# Altium PCB LitosConnector.PcbDoc
Units mm, origin at the board's own origin, x right, y up, seen from the top; angles counter-clockwise.
Board outline 53 x 160.5 mm, 2 copper layers (Top Layer, Bottom Layer); 7 components, 120 nets, 244 pads, 54 vias.
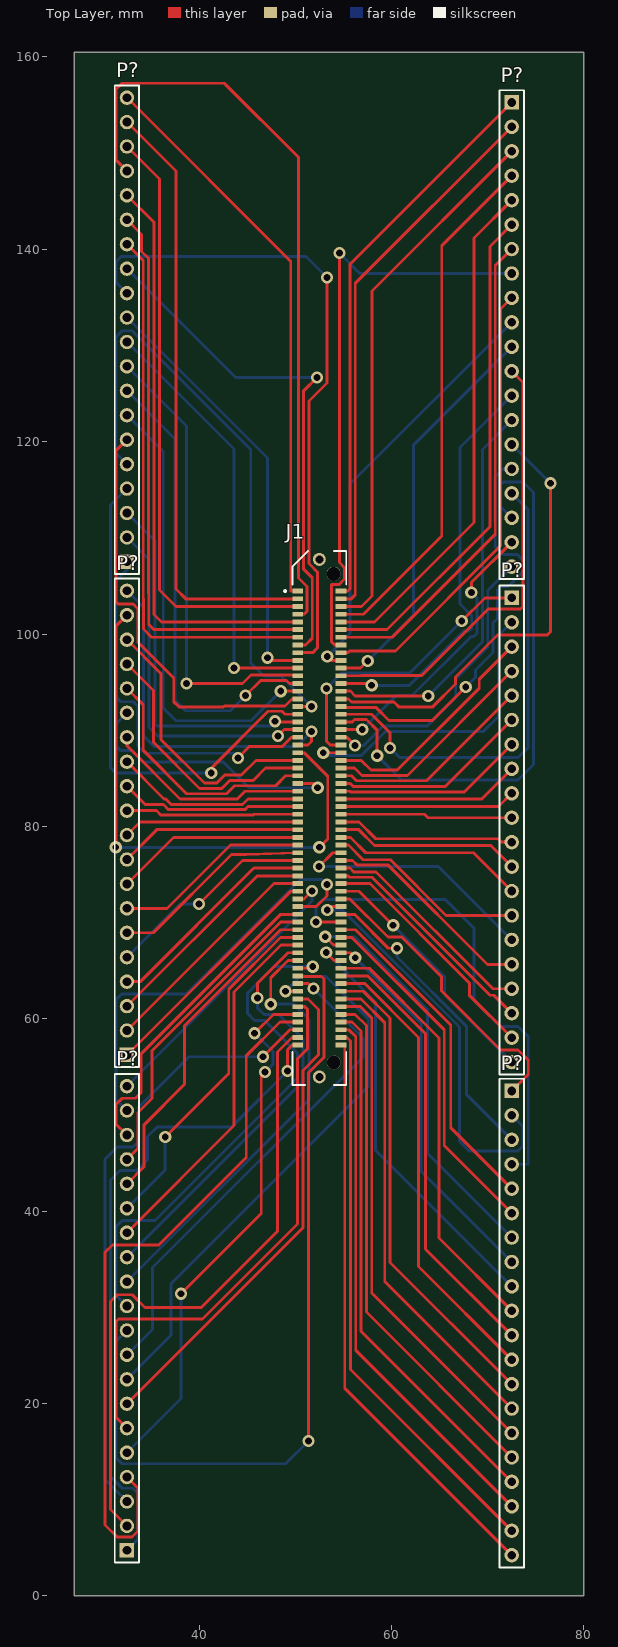
[diagram p0: Top Layer view]
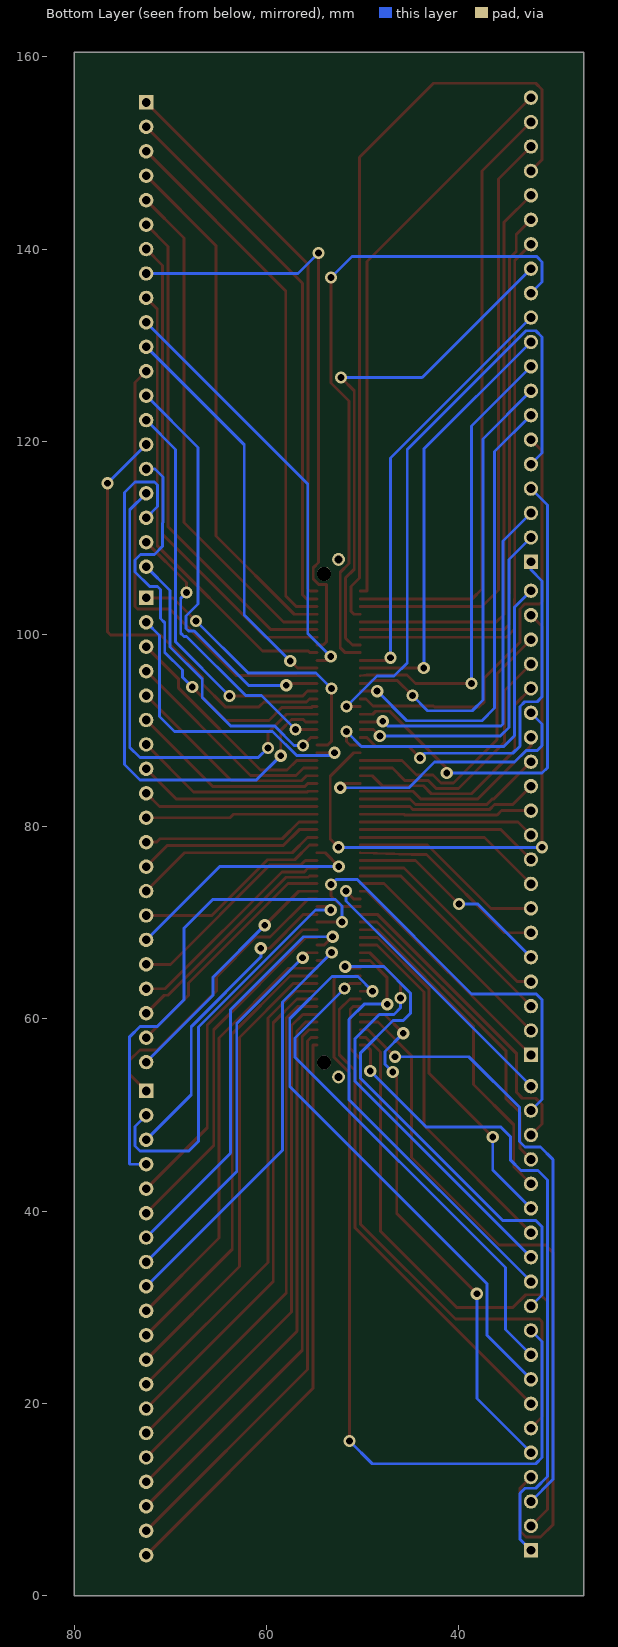
[diagram p1: Bottom Layer view, seen from below]

## Layer stack, top to bottom
Top Solder: solder mask 0.0102, Solder Resist, Dk 3.5
Top Layer: signal copper 0.0356
Dielectric 1: dielectric 0.32, FR-4, Dk 4.8
Bottom Layer: signal copper 0.0356
Bottom Solder: solder mask 0.0102, Solder Resist, Dk 3.5

## Board outline
27,0 80,0 80,160.5 27,160.5

## Design rules (kind name [scope] priority, off if disabled: settings)
Clearance [All] p1: gap=0.254 ignorepadtopadclearanceinfootprint=FALSE except(0: Arc-Hole Track-Hole SMDPad-Hole THPad-Hole Via-Hole Fill-Hole Poly-Hole Region-Hole Text-Hole)
PolygonConnect [All] p1: connectstyle=Relief reliefconductorwidth=0.254 reliefentries=4 polygonreliefangle="90 Angle" airgapwidth=0.254
RoutingVias [All] p1: holewidth=0.711 width=1.27 viastyle="Through Hole" minholewidth=0.711 minwidth=1.27 maxholewidth=0.711 maxwidth=1.27
SolderMaskExpansion [All] p1: expansion=0.102 istentingtop=FALSE
Width [All] p1: maxlimit=0.3 minlimit=0.254 preferedwidth=0.3 minimp=50.000000 maximp=50.000000 favimp=50.000000
30 further rules are at their usual default settings.

## Components (designator, comment, footprint, x,y, rotation, side; value= is the part's Value field where it differs from the comment)
J1 "ERF8-060-05.0-L-DV-L-TR" SAMTEC_ERF8-060-05.0-L-DV-L-TR 52.5,80.86 r90 top
P? "Header 20" HDR1X20 72.5,155.26 r270 top
P? "Header 20" HDR1X20 32.5,56.24 r90 top
P? "Header 20" HDR1X20 32.5,4.74 r90 top
P? "Header 20" HDR1X20 32.5,107.5 r90 top
P? "Header 20" HDR1X20 72.5,103.76 r270 top
P? "Header 20" HDR1X20 72.5,52.5 r270 top

## Footprints (in the part's own frame and the unit in brackets; to place one, negate y for a bottom-side part, rotate by r counter-clockwise, add the part's x,y. Pads: shape width x height; smd on the part's side, far side on the other; paste and mask are expansions set on the pad)
HDR1X20 [mm] "Connector; Header; 20 Position"
  rect 1.5x1.5 hole 0.9: 1(0,0)
  round 1.5 hole 0.9: 2(2.54,0) 3(5.08,0) 4(7.62,0) 5(10.16,0) 6(12.7,0) 7(15.24,0) 8(17.78,0) 9(20.32,0) 10(22.86,0) 11(25.4,0) 12(27.94,0) 13(30.48,0) 14(33.02,0) 15(35.56,0) 16(38.1,0) 17(40.64,0) 18(43.18,0) 19(45.72,0) 20(48.26,0)
  silkscreen extent -1.27,-1.27 49.53,1.27
SAMTEC_ERF8-060-05.0-L-DV-L-TR [mm]
  rect 0.5x1.1 smd: 01(23.6,2.25) 02(23.6,-2.25) 03(22.8,2.25) 04(22.8,-2.25) 05(22,2.25) 06(22,-2.25) 07(21.2,2.25) 08(21.2,-2.25) 09(20.4,2.25) 10(20.4,-2.25) 11(19.6,2.25) 12(19.6,-2.25) 13(18.8,2.25) 14(18.8,-2.25) 15(18,2.25) 16(18,-2.25) 17(17.2,2.25) 18(17.2,-2.25) 19(16.4,2.25) 20(16.4,-2.25) 21(15.6,2.25) 22(15.6,-2.25) 23(14.8,2.25) 24(14.8,-2.25) 25(14,2.25) 26(14,-2.25) 27(13.2,2.25) 28(13.2,-2.25) 29(12.4,2.25) 30(12.4,-2.25) 31(11.6,2.25) 32(11.6,-2.25) 33(10.8,2.25) 34(10.8,-2.25) 35(10,2.25) 36(10,-2.25) 37(9.2,2.25) 38(9.2,-2.25) 39(8.4,2.25) 40(8.4,-2.25) 41(7.6,2.25) 42(7.6,-2.25) 43(6.8,2.25) 44(6.8,-2.25) 45(6,2.25) 46(6,-2.25) 47(5.2,2.25) 48(5.2,-2.25) 49(4.4,2.25) 50(4.4,-2.25) 51(3.6,2.25) 52(3.6,-2.25) 53(2.8,2.25) 54(2.8,-2.25) 55(2,2.25) 56(2,-2.25) 57(1.2,2.25) 58(1.2,-2.25) 59(0.4,2.25) 60(0.4,-2.25) 61(-0.4,2.25) 62(-0.4,-2.25) 63(-1.2,2.25) 64(-1.2,-2.25) 65(-2,2.25) 66(-2,-2.25) 67(-2.8,2.25) 68(-2.8,-2.25) 69(-3.6,2.25) 70(-3.6,-2.25) 71(-4.4,2.25) 72(-4.4,-2.25) 73(-5.2,2.25) 74(-5.2,-2.25) 75(-6,2.25) 76(-6,-2.25) 77(-6.8,2.25) 78(-6.8,-2.25) 79(-7.6,2.25) 80(-7.6,-2.25) 81(-8.4,2.25) 82(-8.4,-2.25) 83(-9.2,2.25) 84(-9.2,-2.25) 85(-10,2.25) 86(-10,-2.25) 87(-10.8,2.25) 88(-10.8,-2.25) 89(-11.6,2.25) 90(-11.6,-2.25) 91(-12.4,2.25) 92(-12.4,-2.25) 93(-13.2,2.25) 94(-13.2,-2.25) 95(-14,2.25) 96(-14,-2.25) 97(-14.8,2.25) 98(-14.8,-2.25) 99(-15.6,2.25) 100(-15.6,-2.25) 101(-16.4,2.25) 102(-16.4,-2.25) 103(-17.2,2.25) 104(-17.2,-2.25) 105(-18,2.25) 106(-18,-2.25) 107(-18.8,2.25) 108(-18.8,-2.25) 109(-19.6,2.25) 110(-19.6,-2.25) 111(-20.4,2.25) 112(-20.4,-2.25) 113(-21.2,2.25) 114(-21.2,-2.25) 115(-22,2.25) 116(-22,-2.25) 117(-22.8,2.25) 118(-22.8,-2.25) 119(-23.6,2.25) 120(-23.6,-2.25)
  round 1.338 hole 0.83: S1(-26.9,0) S2(26.9,0)
  round 1.45 hole 1.45 unplated: ""(-25.4,-1.5) ""(25.4,-1.5)
  silkscreen extent -27.75,-2.8 27.75,3.66

## Part data
P? P? P? P? P? P?: "Header, 20-Pin", LatestRevisionDate=17-Jul-2002, LatestRevisionNote="Re-released for DXP Platform.", Publisher="Altium Limited"

## Via types
v1: diameter 1.27, hole 0.711, Top Layer to Bottom Layer, 54 vias

## Nets (pads, with @x,y where several pads share a name; then routed paths per layer and width w, separated by ;. In a path a pad name is that pad's centre, name@x,y a point inside that pad or via, vN(x,y) a via of type N, cw(c..) or ccw(c..) an arc to the next point about the centre after c; other vN are vias at no path point)
NetJ1_01: J1.01 P?.20@32.5,155.76 | length 59.1
  Top Layer w0.3: P?.20@32.5,155.76 49.53,138.73 49.53,104.46 J1.01
NetJ1_02: J1.02 P?.1@72.5,155.26 | length 58.6
  Top Layer w0.3: J1.02 55.47,104.46 55.683,104.673 55.683,138.443 P?.1@72.5,155.26
NetJ1_03: J1.03 P?.19@32.5,153.22 | length 63.7
  Top Layer w0.3: P?.19@32.5,153.22 37.592,148.128 37.592,104.676 38.608,103.66 J1.03
NetJ1_04: J1.04 P?.2@72.5,152.72 | length 57
  Top Layer w0.3: J1.04 55.821,103.66 56.237,104.076 56.237,136.457 P?.2@72.5,152.72
NetJ1_05: J1.05 P?.18@32.5,150.68 | length 62.6
  Top Layer w0.3: P?.18@32.5,150.68 35.87,147.31 35.87,104.582 37.592,102.86 J1.05
NetJ1_06: J1.06 P?.3@72.5,150.18 | length 55.9
  Top Layer w0.3: J1.06 56.896,102.86 57.988,103.952 57.988,135.668 P?.3@72.5,150.18
NetJ1_07: J1.07 P?.17@32.5,148.14 | length 80
  Top Layer w0.3: P?.17@32.5,148.14 31.344,149.296 31.344,156.591 32.004,157.251 42.621,157.251 50.319,149.554 50.319,105.83 51.206,104.943 51.206,102.362 50.904,102.06 J1.07
NetJ1_08: J1.08 P?.4@72.5,147.64 | length 54.3
  Top Layer w0.3: J1.08 57.102,102.06 65.227,110.185 65.227,140.367 P?.4@72.5,147.64
NetJ1_09: J1.09 P?.16@32.5,145.6 | length 60
  Top Layer w0.3: P?.16@32.5,145.6 35.296,142.804 35.296,120.138 35.316,120.119 35.316,102.044 36.1,101.26 J1.09
NetJ1_10: J1.10 P?.5@72.5,145.1 | length 53.2
  Top Layer w0.3: J1.10 58.233,101.26 68.58,111.607 68.58,141.18 P?.5@72.5,145.1
NetJ1_11: J1.11 P?.15@32.5,143.06 | length 58.7
  Top Layer w0.3: P?.15@32.5,143.06 34.024,141.536 34.024,139.779 34.742,139.061 34.742,104.242 34.762,104.222 34.762,100.977 35.279,100.46 J1.11
NetJ1_12: J1.12 P?.6@72.5,142.56 | length 52.3
  Top Layer w0.3: J1.12 59.546,100.46 70.238,111.152 70.238,140.298 P?.6@72.5,142.56
NetJ1_13: J1.13 P?.14@32.5,140.52 | length 57.1
  Top Layer w0.3: P?.14@32.5,140.52 34.188,138.832 34.188,103.668 34.208,103.648 34.208,100.506 35.054,99.66 J1.13
NetJ1_14: J1.14 P?.7@72.5,140.02 | length 50.8
  Top Layer w0.3: J1.14 60.083,99.66 70.792,110.369 70.792,138.312 P?.7@72.5,140.02
NetJ1_15: J1.15 P?.13@32.5,137.98 | length 54.3
  Top Layer w0.3: J1.15 51.057,98.86 51.765,99.568 51.765,105.842 50.873,106.734 50.873,125.295 v1(52.248,126.67)
  Bottom Layer w0.3: P?.13@32.5,137.98 43.81,126.67 v1(52.248,126.67)
NetJ1_16: J1.16 P?.8@72.5,137.48 | length 61.5
  Top Layer w0.3: v1(54.585,139.598) 54.585,107.442 55.129,106.898 55.129,105.726 54.534,105.131 53.772,105.131 53.772,99.19 54.102,98.86 J1.16
  Bottom Layer w0.3: v1(54.585,139.598) 56.703,137.48 P?.8@72.5,137.48
NetJ1_17: J1.17 P?.12@32.5,135.44 | length 68.7
  Top Layer w0.3: J1.17 51.816,98.06 52.324,98.568 52.324,106.418 51.427,107.316 51.427,124.223 53.289,126.086 v1(53.289,137.058)
  Bottom Layer w0.3: P?.12@32.5,135.44 31.344,136.596 31.344,138.684 31.902,139.243 51.105,139.243 v1(53.289,137.058)
NetJ1_18: J1.18 P?.9@72.5,134.94 | length 47.4
  Top Layer w0.3: J1.18 55.464,98.06 55.651,98.247 60.424,98.247 71.346,109.169 71.346,133.786 P?.9@72.5,134.94
NetJ1_19: J1.19 P?.11@32.5,132.9 | length 44.7
  Top Layer w0.3: v1(47.114,97.536) 47.39,97.26 J1.19
  Bottom Layer w0.3: P?.11@32.5,132.9 47.114,118.286 v1(47.114,97.536)
NetJ1_20: J1.20 P?.10@72.5,132.4 | length 44.3
  Top Layer w0.3: v1(53.315,97.663) 53.718,97.26 J1.20
  Bottom Layer w0.3: v1(53.315,97.663) 55.702,100.051 55.702,115.602 P?.10@72.5,132.4
NetJ1_21: J1.21 P?.10@32.5,130.36 | length 45.1
  Top Layer w0.3: v1(43.638,96.46) J1.21
  Bottom Layer w0.3: P?.10@32.5,130.36 43.638,119.222 v1(43.638,96.46)
NetJ1_22: J1.22 P?.11@72.5,129.86 | length 41.9
  Top Layer w0.3: J1.22 56.785,96.46 v1(57.531,97.206)
  Bottom Layer w0.3: v1(57.531,97.206) 62.306,101.981 62.306,119.666 P?.11@72.5,129.86
NetJ1_23: J1.23 P?.9@32.5,127.82 | length 47.5
  Top Layer w0.3: v1(38.684,94.843) 44.506,94.843 45.388,95.725 49.581,95.725 J1.23
  Bottom Layer w0.3: P?.9@32.5,127.82 38.684,121.636 v1(38.684,94.843)
NetJ1_24: J1.24 P?.12@72.5,127.32 | length 46.8
  Top Layer w0.3: J1.24 56.871,95.66 56.918,95.707 63.17,95.707 70.053,102.591 73.406,102.591 73.66,102.845 73.66,126.16 P?.12@72.5,127.32
NetJ1_25: J1.25 P?.8@32.5,125.28 | length 48.9
  Top Layer w0.3: v1(44.827,93.594) 46.404,95.171 49.092,95.171 49.403,94.86 J1.25
  Bottom Layer w0.3: P?.8@32.5,125.28 37.49,120.29 37.49,93.141 38.608,92.024 43.256,92.024 v1(44.827,93.594)
NetJ1_26: J1.26 P?.13@72.5,124.78 | length 43.1
  Top Layer w0.3: J1.26 57.743,94.86 v1(57.937,94.666)
  Bottom Layer w0.3: v1(57.937,94.666) 61.869,94.666 67.511,100.307 68.072,100.307 68.349,100.584 68.349,101.882 67.107,103.124 67.107,119.387 P?.13@72.5,124.78
NetJ1_27: J1.27 P?.7@32.5,122.74 | length 47.8
  Top Layer w0.3: v1(48.489,94.06) J1.27
  Bottom Layer w0.3: P?.7@32.5,122.74 36.275,118.965 36.275,92.296 37.592,90.979 45.408,90.979 v1(48.489,94.06)
NetJ1_28: J1.28 P?.14@72.5,122.24 | length 41.5
  Top Layer w0.3: J1.28 55.728,94.06 56.22,93.568 v1(63.826,93.568)
  Bottom Layer w0.3: v1(63.826,93.568) 69.457,99.199 69.457,119.197 P?.14@72.5,122.24
NetJ1_29: J1.29 P?.6@32.5,120.2 | length 44.6
  Top Layer w0.3: P?.6@32.5,120.2 31.344,119.044 31.344,103.378 31.598,103.124 33.146,103.124 33.654,102.616 33.654,99.142 37.363,95.433 37.363,92.964 37.897,92.431 42.52,92.431 42.621,92.532 48.92,92.532 49.648,93.26 J1.29
NetJ1_30: J1.30 P?.15@72.5,119.7 | length 46.9
  Top Layer w0.3: J1.30 55.524,93.26 55.846,92.939 60.249,92.939 60.757,92.431 64.287,92.431 66.658,94.801 66.658,95.546 71.01,99.898 76.2,99.898 76.53,100.228 v1(76.53,115.67)
  Bottom Layer w0.3: P?.15@72.5,119.7 v1(76.53,115.67)
NetJ1_31: J1.31 P?.5@32.5,117.66 | length 64.9
  Top Layer w0.3: J1.31 v1(51.689,92.46)
  Bottom Layer w0.3: P?.5@32.5,117.66 31.344,118.816 31.344,130.861 32.004,131.521 33.02,131.521 45.364,119.177 45.364,97.003 46.736,95.631 48.518,95.631 v1(51.689,92.46)
NetJ1_32: J1.32 P?.16@72.5,117.16 | length 44
  Top Layer w0.3: J1.32 55.245,92.46 55.245,92.38 58.369,92.38 59.741,91.008 64.237,91.008 v1(67.716,94.488)
  Bottom Layer w0.3: v1(67.716,94.488) 68.732,95.504 68.732,96.258 70.565,98.091 70.565,101.172 71.018,101.625 71.018,104.623 71.323,104.927 72.136,104.927 73.654,106.445 73.654,107.702 73.076,108.28 71.628,108.28 70.79,109.118 70.79,111.557 70.764,111.582 70.764,116.332 71.592,117.16 P?.16@72.5,117.16
NetJ1_33: J1.33 P?.4@32.5,115.12 | length 52.5
  Top Layer w0.3: v1(41.261,85.547) 41.261,86.055 47.176,91.971 48.632,91.971 48.943,91.66 J1.33
  Bottom Layer w0.3: P?.4@32.5,115.12 30.792,113.412 30.792,86.099 31.344,85.547 v1(41.261,85.547)
NetJ1_34: J1.34 P?.17@72.5,114.62 | length 49.8
  Top Layer w0.3: J1.34 57.912,91.66 59.835,89.737 v1(59.835,88.163)
  Bottom Layer w0.3: v1(59.835,88.163) 60.851,87.147 73.152,87.147 74.208,88.203 74.208,112.912 P?.17@72.5,114.62
NetJ1_35: J1.35 P?.3@32.5,112.58 | length 38.3
  Top Layer w0.3: v1(47.904,90.932) 47.976,90.86 J1.35
  Bottom Layer w0.3: P?.3@32.5,112.58 35.407,109.673 35.407,90.653 35.636,90.424 47.396,90.424 v1(47.904,90.932)
NetJ1_36: J1.36 P?.18@72.5,112.08 | length 61.1
  Top Layer w0.3: J1.36 55.925,90.86 56.164,91.099 57.404,91.099 58.511,89.992 v1(58.511,87.351)
  Bottom Layer w0.3: v1(58.511,87.351) 61.051,84.811 73.152,84.811 74.762,86.421 74.762,114.697 73.66,115.799 71.628,115.799 71.323,115.494 71.323,113.257 P?.18@72.5,112.08
NetJ1_37: J1.37 P?.2@32.5,110.04 | length 36.8
  Top Layer w0.3: v1(48.209,89.408) 48.861,90.06 J1.37
  Bottom Layer w0.3: P?.2@32.5,110.04 34.797,107.743 34.797,90.294 35.683,89.408 v1(48.209,89.408)
NetJ1_38: J1.38 P?.19@72.5,109.54 | length 29.8
  Top Layer w0.3: J1.38 v1(56.964,90.06) ; v1(68.301,104.318) 68.301,105.341 P?.19@72.5,109.54
  Bottom Layer w0.3: v1(56.964,90.06) 60.5,93.597 62.144,93.597 68.301,99.753 68.58,99.753 68.903,100.076 68.903,103.715 v1(68.301,104.318)
NetJ1_39: J1.39 P?.1@32.5,107.5 | length 39.3
  Top Layer w0.3: v1(44.031,87.109) 45.212,88.29 48.641,88.29 49.611,89.26 J1.39
  Bottom Layer w0.3: P?.1@32.5,107.5 32.5,106.68 31.346,105.526 31.346,93.472 31.854,92.964 33.147,92.964 33.655,92.456 33.655,88.341 34.394,87.602 43.538,87.602 v1(44.031,87.109)
NetJ1_40: J1.40 P?.20@72.5,107 | length 30.4
  Top Layer w0.3: J1.40 55.368,89.26 v1(56.21,88.417)
  Bottom Layer w0.3: v1(56.21,88.417) 57.125,88.417 59.131,90.424 63.713,90.424 66.677,93.389 66.677,95.311 70.011,98.645 70.011,104.511 P?.20@72.5,107
NetJ1_41: J1.41 P?.20@32.5,104.5 | length 37
  Top Layer w0.3: J1.41 51.308,88.46 51.689,88.841 v1(51.689,89.866)
  Bottom Layer w0.3: P?.20@32.5,104.5 34.214,102.786 34.214,89.433 35.334,88.313 50.137,88.313 v1(51.689,89.866)
NetJ1_42: J1.42 P?.1@72.5,103.76 | length 30.3
  Top Layer w0.3: v1(53.238,94.336) 53.238,88.849 53.628,88.46 J1.42 ; v1(67.31,101.346) 69.724,103.76 P?.1@72.5,103.76
  Bottom Layer w0.3: v1(53.238,94.336) 54.839,95.936 61.9,95.936 v1(67.31,101.346)
NetJ1_43: J1.43 P?.19@32.5,101.96 | length 57.7
  Top Layer w0.3: v1(31.344,77.826) 31.344,100.804 P?.19@32.5,101.96 ; J1.43 50.922,87.66 53.369,85.213 53.369,78.693 v1(52.502,77.826)
  Bottom Layer w0.3: v1(31.344,77.826) v1(52.502,77.826)
NetJ1_44: J1.44 P?.2@72.5,101.22 | length 32.2
  Top Layer w0.3: v1(52.913,87.66) J1.44
  Bottom Layer w0.3: v1(52.913,87.66) 53.218,87.355 56.857,87.355 59.366,89.864 69.543,89.864 71.119,91.44 71.119,99.839 P?.2@72.5,101.22
NetJ1_45: J1.45 P?.18@32.5,99.42 | length 28.9
  Top Layer w0.3: P?.18@32.5,99.42 36.043,95.877 36.043,89.015 40.549,84.508 41.841,84.508 42.672,85.339 44.387,85.339 45.908,86.86 J1.45
NetJ1_46: J1.46 P?.3@72.5,98.68 | length 24
  Top Layer w0.3: J1.46 56.855,86.86 57.865,85.85 60.602,85.85 69.123,94.371 69.123,95.303 P?.3@72.5,98.68
NetJ1_47: J1.47 P?.17@32.5,96.88 | length 27.1
  Top Layer w0.3: P?.17@32.5,96.88 35.255,94.125 35.255,88.74 40.041,83.954 42.349,83.954 43.18,84.785 45.622,84.785 46.897,86.06 J1.47
NetJ1_48: J1.48 P?.4@72.5,96.14 | length 22.6
  Top Layer w0.3: J1.48 56.155,86.06 56.919,85.295 61.655,85.295 P?.4@72.5,96.14
NetJ1_49: J1.49 P?.16@32.5,94.34 | length 25.8
  Top Layer w0.3: P?.16@32.5,94.34 34.188,92.652 34.188,87.909 38.698,83.4 42.862,83.4 43.688,84.226 47.963,84.226 48.997,85.26 J1.49
NetJ1_50: J1.50 P?.5@72.5,93.6 | length 21.6
  Top Layer w0.3: J1.50 55.844,85.26 56.363,84.741 63.641,84.741 P?.5@72.5,93.6
NetJ1_51: J1.51 P?.15@32.5,91.8 | length 28.9
  Top Layer w0.3: J1.51 51.887,84.46 v1(52.324,84.023)
  Bottom Layer w0.3: P?.15@32.5,91.8 31.346,90.646 31.346,88.392 31.864,87.874 33.02,87.874 34.204,86.69 42.52,86.69 45.187,84.023 v1(52.324,84.023)
NetJ1_52: J1.52 P?.6@72.5,91.06 | length 20.7
  Top Layer w0.3: J1.52 55.704,84.46 56.018,84.147 65.587,84.147 P?.6@72.5,91.06
NetJ1_53: J1.53 P?.14@32.5,89.26 | length 21.3
  Top Layer w0.3: P?.14@32.5,89.26 32.5,88.376 38.03,82.846 43.962,82.846 44.776,83.66 J1.53
NetJ1_54: J1.54 P?.7@72.5,88.52 | length 19.8
  Top Layer w0.3: J1.54 55.677,83.66 55.744,83.593 67.573,83.593 P?.7@72.5,88.52
NetJ1_55: J1.55 P?.13@32.5,86.72 | length 19.8
  Top Layer w0.3: P?.13@32.5,86.72 36.36,82.86 36.529,82.86 37.097,82.292 44.516,82.292 45.084,82.86 J1.55
NetJ1_56: J1.56 P?.8@72.5,85.98 | length 19
  Top Layer w0.3: J1.56 69.38,82.86 P?.8@72.5,85.98
NetJ1_57: J1.57 P?.12@32.5,84.18 | length 18.9
  Top Layer w0.3: P?.12@32.5,84.18 34.399,82.281 36.292,82.281 36.835,81.738 44.748,81.738 45.07,82.06 J1.57
NetJ1_58: J1.58 P?.9@72.5,83.44 | length 18.3
  Top Layer w0.3: J1.58 71.12,82.06 P?.9@72.5,83.44
NetJ1_59: J1.59 P?.11@32.5,81.64 | length 18
  Top Layer w0.3: P?.11@32.5,81.64 35.558,81.64 36.014,81.184 45.624,81.184 45.7,81.26 J1.59
NetJ1_60: J1.60 P?.10@72.5,80.9 | length 17.9
  Top Layer w0.3: J1.60 63.424,81.26 63.784,80.9 P?.10@72.5,80.9
NetJ1_61: J1.61 P?.10@32.5,79.1 | length 18.3
  Top Layer w0.3: P?.10@32.5,79.1 33.86,80.46 J1.61
NetJ1_62: J1.62 P?.11@72.5,78.36 | length 18.6
  Top Layer w0.3: J1.62 56.617,80.46 58.362,78.715 71.07,78.715 71.425,78.36 P?.11@72.5,78.36
NetJ1_63: J1.63 P?.9@32.5,76.56 | length 19
  Top Layer w0.3: P?.9@32.5,76.56 35.6,79.66 J1.63
NetJ1_64: J1.64 P?.12@72.5,75.82 | length 19.3
  Top Layer w0.3: J1.64 56.592,79.66 58.248,78.003 70.317,78.003 P?.12@72.5,75.82
NetJ1_65: J1.65 P?.8@32.5,74.02 | length 19.8
  Top Layer w0.3: P?.8@32.5,74.02 37.34,78.86 J1.65
NetJ1_66: J1.66 P?.13@72.5,73.28 | length 20.1
  Top Layer w0.3: J1.66 55.728,78.86 57.321,77.267 68.513,77.267 P?.13@72.5,73.28
NetJ1_67: J1.67 P?.7@32.5,71.48 | length 20.5
  Top Layer w0.3: P?.7@32.5,71.48 36.671,71.48 43.251,78.06 J1.67
NetJ1_68: J1.68 P?.14@72.5,70.74 | length 20.8
  Top Layer w0.3: J1.68 55.519,78.06 57.048,76.53 59.893,76.53 65.683,70.74 P?.14@72.5,70.74
NetJ1_69: J1.69 P?.6@32.5,68.94 | length 21.1
  Top Layer w0.3: P?.6@32.5,68.94 35.23,68.94 43.365,77.075 44.919,77.075 J1.69
NetJ1_70: J1.70 P?.15@72.5,68.2 | length 26
  Top Layer w0.3: v1(52.476,75.842) 53.894,77.26 J1.70
  Bottom Layer w0.3: v1(52.476,75.842) 64.858,75.842 P?.15@72.5,68.2
NetJ1_71: J1.71 P?.5@32.5,66.4 | length 21.9
  Top Layer w0.3: v1(39.98,71.933) 44.507,76.46 J1.71
  Bottom Layer w0.3: P?.5@32.5,66.4 38.033,71.933 v1(39.98,71.933)
NetJ1_72: J1.72 P?.16@72.5,65.66 | length 22.2
  Top Layer w0.3: J1.72 55.956,76.46 56.448,75.968 59.668,75.968 69.976,65.66 P?.16@72.5,65.66
NetJ1_73: J1.73 P?.4@32.5,63.86 | length 22.6
  Top Layer w0.3: P?.4@32.5,63.86 33.89,63.86 45.69,75.66 J1.73
NetJ1_74: J1.74 P?.17@72.5,63.12 | length 22.9
  Top Layer w0.3: J1.74 55.677,75.66 56.073,75.263 58.395,75.263 70.538,63.12 P?.17@72.5,63.12
NetJ1_75: J1.75 P?.3@32.5,61.32 | length 23.4
  Top Layer w0.3: P?.3@32.5,61.32 46.04,74.86 J1.75
NetJ1_76: J1.76 P?.18@72.5,60.58 | length 23.7
  Top Layer w0.3: J1.76 55.518,74.86 55.669,74.709 57.98,74.709 70.239,62.451 70.629,62.451 P?.18@72.5,60.58
NetJ1_77: J1.77 P?.2@32.5,58.78 | length 24.1
  Top Layer w0.3: P?.2@32.5,58.78 47.78,74.06 J1.77
NetJ1_78: J1.78 P?.19@72.5,58.04 | length 25.1
  Top Layer w0.3: J1.78 57.762,74.06 68.093,63.73 68.093,62.447 P?.19@72.5,58.04
NetJ1_79: J1.79 P?.1@32.5,56.24 | length 24.8
  Top Layer w0.3: P?.1@32.5,56.24 49.52,73.26 J1.79
NetJ1_80: J1.80 P?.20@72.5,55.5 | length 26.2
  Top Layer w0.3: J1.80 56.632,73.26 v1(60.173,69.719)
  Bottom Layer w0.3: v1(60.173,69.719) 65.536,64.356 65.536,62.464 P?.20@72.5,55.5
NetJ1_81: J1.81 P?.20@32.5,53 | length 30.1
  Top Layer w0.3: J1.81 50.921,72.46 v1(51.74,73.279)
  Bottom Layer w0.3: P?.20@32.5,53 51.74,72.24 v1(51.74,73.279)
NetJ1_82: J1.82 P?.1@72.5,52.5 | length 31.2
  Top Layer w0.3: J1.82 55.657,72.46 59.628,68.489 61.074,68.489 65.197,64.367 65.197,62.921 71.348,56.769 73.152,56.769 74.219,55.702 74.219,54.219 P?.1@72.5,52.5
NetJ1_83: J1.83 P?.19@32.5,50.46 | length 44
  Top Layer w0.3: J1.83 52.172,71.66 53.289,72.778 v1(53.289,73.965)
  Bottom Layer w0.3: P?.19@32.5,50.46 31.344,51.616 31.344,61.976 31.953,62.586 38.668,62.586 50.553,74.47 52.784,74.47 v1(53.289,73.965)
NetJ1_84: J1.84 P?.2@72.5,49.96 | length 43.2
  Top Layer w0.3: v1(53.315,71.323) 53.651,71.66 J1.84
  Bottom Layer w0.3: v1(53.315,71.323) 54.889,71.323 67.056,59.157 67.056,47.269 68.072,46.253 73.152,46.253 73.66,46.761 73.66,48.8 P?.2@72.5,49.96
NetJ1_85: J1.85 P?.18@32.5,47.92 | length 33.1
  Top Layer w0.3: P?.18@32.5,47.92 31.344,49.076 31.344,51.079 32.004,51.74 33.401,51.74 33.985,52.324 33.985,56.363 48.483,70.86 J1.85
NetJ1_86: J1.86 P?.3@72.5,47.42 | length 32.1
  Top Layer w0.3: J1.86 56.14,70.86 59.665,67.335 v1(60.583,67.335)
  Bottom Layer w0.3: v1(60.583,67.335) 60.583,66.417 67.818,59.182 67.818,52.102 P?.3@72.5,47.42
NetJ1_87: J1.87 P?.17@32.5,45.38 | length 33.1
  Top Layer w0.3: P?.17@32.5,45.38 33.655,46.535 33.655,50.267 35.113,51.725 35.113,56.681 48.493,70.06 J1.87
NetJ1_88: J1.88 P?.4@72.5,44.88 | length 51.9
  Top Layer w0.3: v1(52.146,70.06) J1.88
  Bottom Layer w0.3: v1(52.146,70.06) 52.146,71.73 52.832,72.415 65.583,72.415 68.58,69.418 68.58,61.976 71.349,59.207 73.152,59.207 74.219,58.141 74.219,44.905 74.193,44.88 P?.4@72.5,44.88
NetJ1_89: J1.89 P?.16@32.5,42.84 | length 34.8
  Top Layer w0.3: P?.16@32.5,42.84 34.29,44.63 34.29,48.981 38.466,53.157 38.466,59.25 48.476,69.26 J1.89
NetJ1_90: J1.90 P?.5@72.5,42.34 | length 35.2
  Top Layer w0.3: J1.90 56.258,69.26 66.157,59.361 66.157,48.683 P?.5@72.5,42.34
NetJ1_91: J1.91 P?.15@32.5,40.3 | length 36.6
  Top Layer w0.3: v1(36.474,47.701) 43.08,54.307 43.08,63.081 48.459,68.46 J1.91
  Bottom Layer w0.3: P?.15@32.5,40.3 36.474,44.274 v1(36.474,47.701)
NetJ1_92: J1.92 P?.6@72.5,39.8 | length 36.7
  Top Layer w0.3: J1.92 55.873,68.46 65.481,58.852 65.481,46.819 P?.6@72.5,39.8
NetJ1_93: J1.93 P?.14@32.5,37.76 | length 38.3
  Top Layer w0.3: P?.14@32.5,37.76 43.634,48.894 43.634,62.794 48.5,67.66 J1.93
NetJ1_94: J1.94 P?.7@72.5,37.26 | length 43.1
  Top Layer w0.3: v1(53.117,68.529) 53.986,67.66 J1.94
  Bottom Layer w0.3: v1(53.117,68.529) 56.134,68.529 63.729,60.935 63.729,46.031 P?.7@72.5,37.26
NetJ1_95: J1.95 P?.13@32.5,35.22 | length 44.4
  Top Layer w0.3: v1(46.055,62.16) 46.055,63.662 49.253,66.86 J1.95
  Bottom Layer w0.3: P?.13@32.5,35.22 50.793,53.513 50.793,57.93 48.263,60.46 46.736,60.46 46.055,61.141 v1(46.055,62.16)
NetJ1_96: J1.96 P?.8@72.5,34.72 | length 40.1
  Top Layer w0.3: J1.96 55.728,66.86 v1(56.236,66.352)
  Bottom Layer w0.3: v1(56.236,66.352) 63.089,59.499 63.089,44.131 P?.8@72.5,34.72
NetJ1_97: J1.97 P?.12@32.5,32.68 | length 46
  Top Layer w0.3: v1(47.447,61.519) 47.447,64.27 49.237,66.06 J1.97
  Bottom Layer w0.3: P?.12@32.5,32.68 51.41,51.59 51.41,59.944 49.835,61.519 v1(47.447,61.519)
NetJ1_98: J1.98 P?.9@72.5,32.18 | length 44.6
  Top Layer w0.3: v1(53.218,66.878) 54.037,66.06 J1.98
  Bottom Layer w0.3: v1(53.218,66.878) 58.344,61.753 58.344,46.336 P?.9@72.5,32.18
NetJ1_99: J1.99 P?.11@32.5,30.14 | length 55.2
  Top Layer w0.3: J1.99 51.655,65.26 v1(51.816,65.421)
  Bottom Layer w0.3: P?.11@32.5,30.14 31.344,31.296 31.344,38.379 32.004,39.04 35.431,39.04 50.239,53.848 50.239,56.414 46.833,59.82 45.768,59.82 45.016,60.571 45.016,62.653 47.785,65.421 v1(51.816,65.421)
NetJ1_100: J1.100 P?.10@72.5,29.64 | length 44.7
  Top Layer w0.3: J1.100 57.682,65.26 64.927,58.015 64.927,37.213 P?.10@72.5,29.64
NetJ1_101: J1.101 P?.10@32.5,27.6 | length 86.5
  Top Layer w0.3: J1.101 50.777,64.46 50.855,64.382 52.737,64.382 52.984,64.135 52.984,56.007 51.359,54.381 v1(51.359,16.104)
  Bottom Layer w0.3: P?.10@32.5,27.6 31.344,26.444 31.344,14.402 32.004,13.741 48.997,13.741 v1(51.359,16.104)
NetJ1_102: J1.102 P?.11@72.5,27.1 | length 46.3
  Top Layer w0.3: J1.102 57.535,64.46 63.551,58.444 63.551,36.049 P?.11@72.5,27.1
NetJ1_103: J1.103 P?.9@32.5,25.06 | length 52.2
  Top Layer w0.3: J1.103 51.377,63.66 v1(51.885,63.152)
  Bottom Layer w0.3: P?.9@32.5,25.06 35.154,27.714 35.154,34.138 57.023,56.007 57.023,58.014 v1(51.885,63.152)
NetJ1_104: J1.104 P?.12@72.5,24.56 | length 47.9
  Top Layer w0.3: J1.104 57.215,63.66 62.814,58.061 62.814,34.246 P?.12@72.5,24.56
NetJ1_105: J1.105 P?.8@32.5,22.52 | length 60.2
  Top Layer w0.3: v1(48.971,62.865) 48.976,62.86 J1.105
  Bottom Layer w0.3: P?.8@32.5,22.52 37.084,27.104 37.084,32.461 57.582,52.959 57.582,59.995 53.194,64.382 50.489,64.382 v1(48.971,62.865)
NetJ1_106: J1.106 P?.13@72.5,22.02 | length 49.5
  Top Layer w0.3: J1.106 57.056,62.86 59.85,60.066 59.85,34.67 P?.13@72.5,22.02
NetJ1_107: J1.107 P?.7@32.5,19.98 | length 51.9
  Top Layer w0.3: P?.7@32.5,19.98 50.793,38.273 50.793,54.628 52.426,56.261 52.426,60.96 51.326,62.06 J1.107
NetJ1_108: J1.108 P?.14@72.5,19.48 | length 51.2
  Top Layer w0.3: J1.108 56.833,62.06 59.296,59.597 59.296,32.684 P?.14@72.5,19.48
NetJ1_109: J1.109 P?.6@32.5,17.44 | length 58.5
  Top Layer w0.3: P?.6@32.5,17.44 31.344,18.596 31.344,28.499 31.623,28.778 40.361,28.778 50.239,38.656 50.239,55.847 51.287,56.896 51.287,60.96 50.987,61.26 J1.109
NetJ1_110: J1.110 P?.15@72.5,16.94 | length 52.9
  Top Layer w0.3: J1.110 56.77,61.26 57.944,60.086 57.944,31.496 P?.15@72.5,16.94
NetJ1_111: J1.111 P?.5@32.5,14.9 | length 56
  Top Layer w0.3: v1(38.125,31.42) 46.457,39.751 46.457,54.051 v1(46.863,54.458) ; v1(45.771,58.496) 47.735,60.46 J1.111
  Bottom Layer w0.3: P?.5@32.5,14.9 38.125,20.525 v1(38.125,31.42) ; v1(45.771,58.496) 47.676,56.591 47.676,55.27 v1(46.863,54.458)
NetJ1_112: J1.112 P?.16@72.5,14.4 | length 54.3
  Top Layer w0.3: J1.112 56.217,60.46 57.39,59.287 57.39,29.51 P?.16@72.5,14.4
NetJ1_113: J1.113 P?.4@32.5,12.36 | length 74.8
  Top Layer w0.3: P?.4@32.5,12.36 33.655,11.205 33.655,6.756 33.02,6.121 31.496,6.121 30.226,7.391 30.226,35.738 30.988,36.5 35.814,36.5 44.907,45.593 44.907,56.159 48.408,59.66 J1.113
NetJ1_114: J1.114 P?.17@72.5,11.86 | length 55.8
  Top Layer w0.3: J1.114 55.909,59.66 56.836,58.733 56.836,27.524 P?.17@72.5,11.86
NetJ1_115: J1.115 P?.3@32.5,9.82 | length 64.2
  Top Layer w0.3: v1(46.634,56.058) 49.437,58.86 J1.115
  Bottom Layer w0.3: P?.3@32.5,9.82 30.226,12.094 30.226,45.39 31.496,46.66 33.122,46.66 33.706,47.244 33.706,50.8 38.964,56.058 v1(46.634,56.058)
NetJ1_116: J1.116 P?.18@72.5,9.32 | length 57.4
  Top Layer w0.3: J1.116 55.567,58.86 56.282,58.145 56.282,25.538 P?.18@72.5,9.32
NetJ1_117: J1.117 P?.2@32.5,7.28 | length 66.9
  Top Layer w0.3: P?.2@32.5,7.28 30.785,8.995 30.785,30.607 31.496,31.318 33.045,31.318 34.392,29.972 40.22,29.972 48.157,37.91 48.157,56.544 49.673,58.06 J1.117
NetJ1_118: J1.118 P?.19@72.5,6.78 | length 59
  Top Layer w0.3: J1.118 55.372,58.06 55.728,57.704 55.728,23.552 P?.19@72.5,6.78
NetJ1_119: J1.119 P?.1@32.5,4.74 | length 68.8
  Top Layer w0.3: v1(49.2,54.568) 49.2,56.775 49.685,57.26 J1.119
  Bottom Layer w0.3: P?.1@32.5,4.74 33.655,5.895 33.655,10.668 33.122,11.201 32.004,11.201 30.785,12.421 30.785,43.231 31.775,44.221 33.528,44.221 34.646,45.339 34.646,47.752 35.662,48.768 43.4,48.768 v1(49.2,54.568)
NetJ1_120: J1.120 P?.20@72.5,4.24 | length 60.6
  Top Layer w0.3: J1.120 55.143,57.26 55.143,21.597 P?.20@72.5,4.24
pads on no net: J1. J1.S1 J1.S2